# EAGLE board CAN_ProtoBoard (EAGLE 7.2.0)
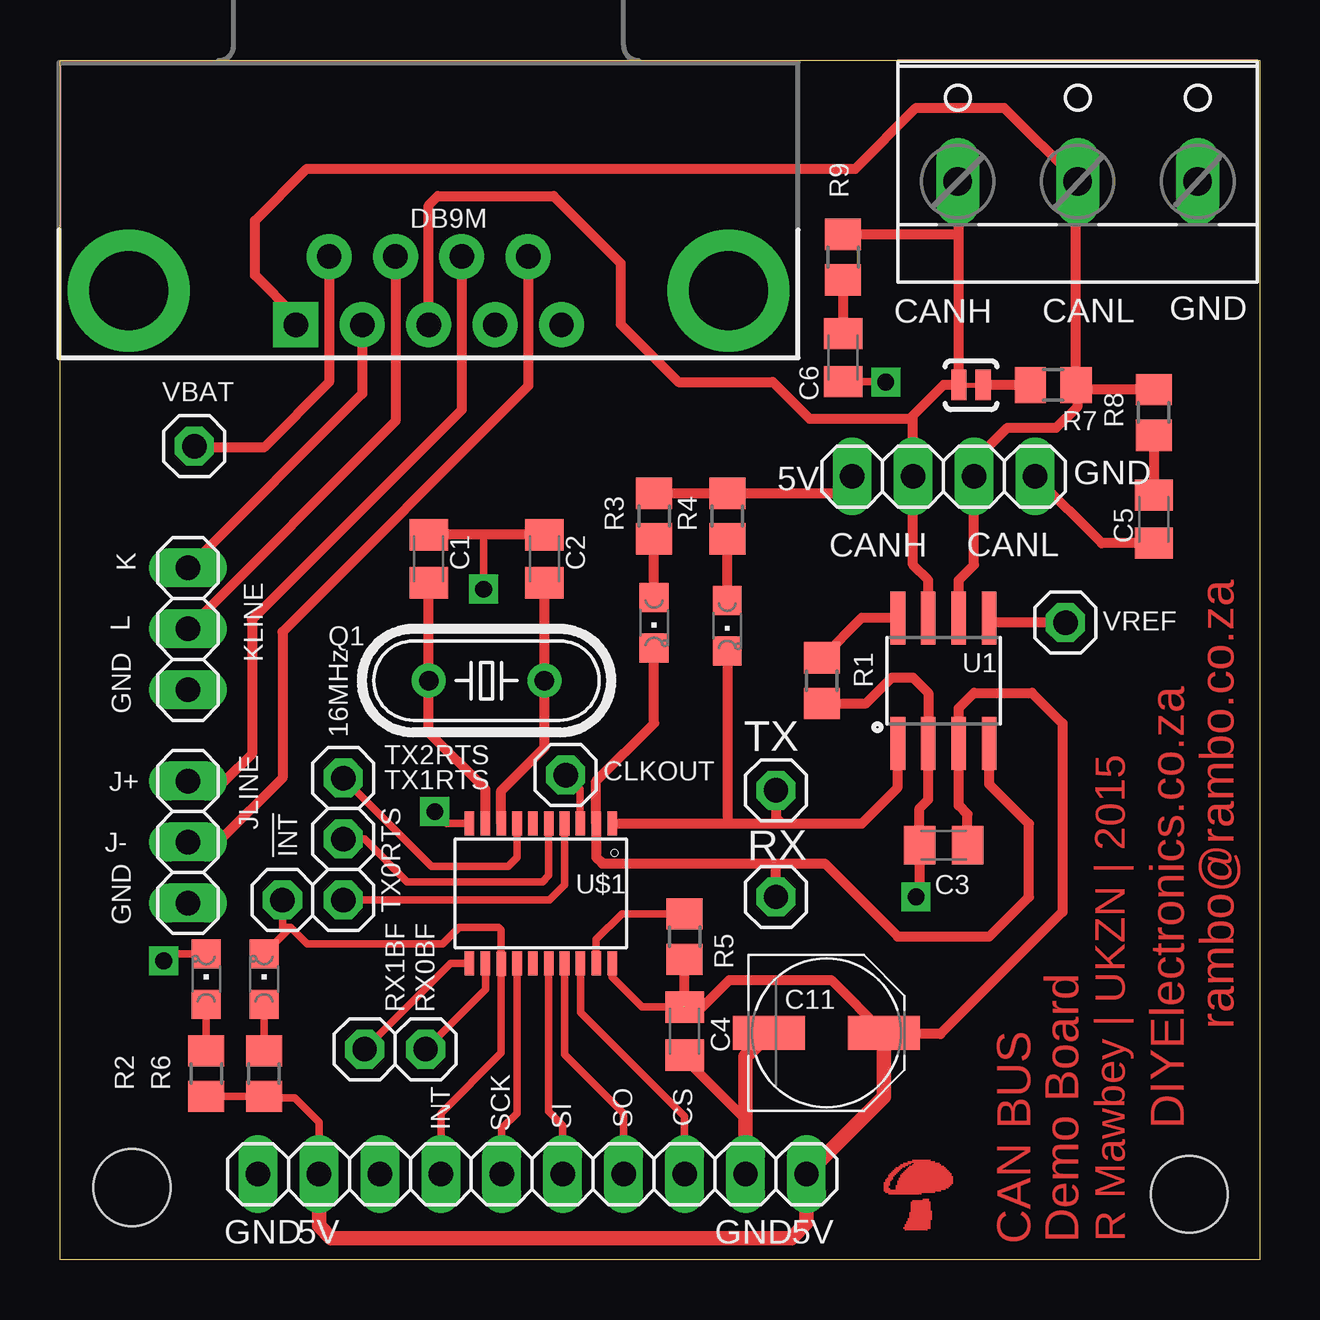
[diagram p0: board, top side]
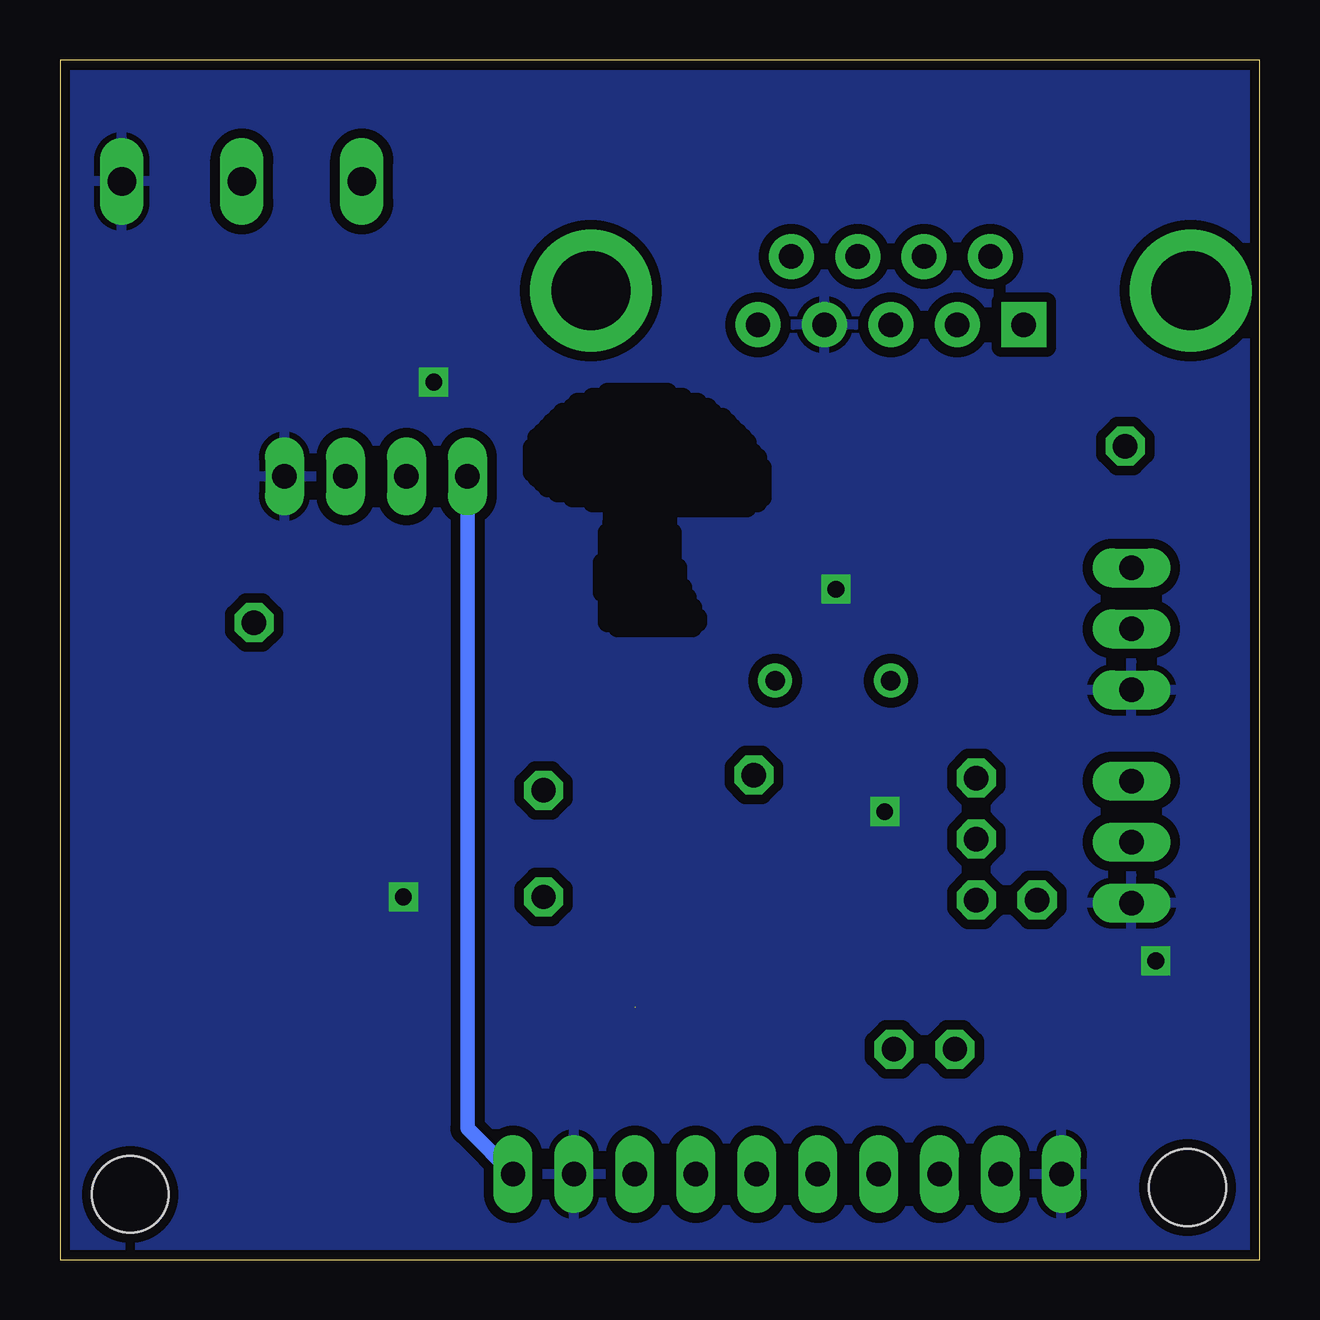
[diagram p1: board, bottom side, seen from below]

Size 50 x 50 mm. Coordinates in mm from the lower left corner, seen from the top.
Outline: 0,0 0,50 50,50 50,0 0,0
Copper layers (1*16): Top 0.035mm / dielectric 1.5mm / Bottom 0.035mm
Design rules "SparkFun": minimum track width 8mil, minimum drill 20mil, track to track 8mil, track to pad 8mil, pad to pad 8mil, via to via 8mil, smd to smd 8mil, copper to edge 10mil, drill to drill 8mil, minimum pad ring 12mil, minimum via ring 10mil, stop-mask expansion 4mil, vias tented up to drill 25mil, thermal gap 10mil
Holes 3.2 mm at 3,3 47.07,2.71
bRestrict: area 23.6,26.4 to 26.8,26.6; area 23.4,26.6 to 27.2,26.8; area 23.6,26.8 to 27.2,27; area 23.6,27 to 27.2,27.2; area 23.9,27.2 to 27.2,27.4; area 23.9,27.4 to 27.2,27.6; area 24.1,27.6 to 27.2,27.8; area 24.1,27.8 to 27.4,28; area 24.3,28 to 27.4,28.2; area 24.3,28.2 to 27.4,28.4; area 24.3,28.4 to 27.4,28.6; area 24.3,28.6 to 27.4,28.9; 50 more areas

## Footprints (pad centres in the part's own frame; a part is rotated, then mirrored left to right if it is on the bottom)
1X01 = drill 1.016 octagon: 1 0,0
C0805K = smd 1.3 x 1.6: 1 -1,0; 2 1,0
PANASONIC_D = smd 3 x 1.4: + 2.4,0; - -2.4,0
1X04 = drill 1.016 long: 1 -3.81,0; 2 -1.27,0; 3 1.27,0; 4 3.81,0
W237-103 = drill 1.194 long: 1 -5,-1.29; 2 0,-1.29; 3 5,-1.29
DB9_MALE = drill 1.016 pad 1.88: 1 5.54,-1.42; 2 2.77,-1.42; 3 0,-1.42; 4 -2.77,-1.42; 6 4.15,1.42; 7 1.38,1.42; 8 -1.38,1.42; 9 -4.15,1.42 | drill 1.016 pad 1.88 square: 5 -5.54,-1.42 | drill 3.302 pad 5.08: G1 -12.5,0; G2 12.5,0
1X10 = drill 1.016 long: 1 -11.43,0; 2 -8.89,0; 3 -6.35,0; 4 -3.81,0; 5 -1.27,0; 6 1.27,0; 7 3.81,0; 8 6.35,0; 9 8.89,0; 10 11.43,0
1X03 = drill 1.016 long: 1 -2.54,0; 2 0,0; 3 2.54,0
CHIPLED_0805 = smd 1.2 x 1.2: A 0,-1.05; C 0,1.05
HC49/S = drill 0.813: 1 -2.413,0; 2 2.413,0
R0805 = smd 1.3 x 1.5: 1 -0.95,0; 2 0.95,0
SJ_2S-TRACE = smd 0.635 x 1.27: 1 -0.508,0; 2 0.508,0
SO08 = smd 0.61 x 2.21: 1 -1.905,-2.616; 2 -0.635,-2.616; 3 0.635,-2.616; 4 1.905,-2.616; 5 1.905,2.616; 6 0.635,2.616; 7 -0.635,2.616; 8 -1.905,2.616
TSSOP20 = smd 1 x 0.4: 1 -2.937,2.693; 2 -2.937,2.032; 3 -2.937,1.372; 4 -2.937,0.712; 5 -2.937,0.051; 6 -2.937,-0.609; 7 -2.937,-1.27; 8 -2.943,-1.93; 9 -2.937,-2.59; 10 -2.937,-3.251; 11 2.905,-3.251; 12 2.905,-2.59; 13 2.911,-1.93; 14 2.905,-1.27; 15 2.905,-0.609; 16 2.905,0.051; 17 2.905,0.712; 18 2.905,1.372; 19 2.905,2.032; 20 2.905,2.693

## Placement (x,y rotation side)
!INT  [1X01]  9.27,14.99 0 top
C1  22pF  [C0805K]  15.37,29.21 270 top
C2  22pF  [C0805K]  20.19,29.21 270 top
C3  100nF  [C0805K]  36.83,17.27 180 top
C4  100nF  [C0805K]  26.04,9.53 270 top
C5  560pF  [C0805K]  45.59,30.86 90 top
C6  560pF  [C0805K]  32.64,37.59 90 top
C11  100uF  [PANASONIC_D]  31.95,9.45 0 top
CAN  [1X04]  36.83,32.64 180 top
CANSCREW  [W237-103]  42.42,46.23 0 top
CLKOUT  [1X01]  21.08,20.19 0 top
DB9M  [DB9_MALE]  15.37,40.39 0 top
IO  [1X10]  19.68,3.56 0 top
JLINE  [1X03]  5.33,17.4 90 top
KLINE  [1X03]  5.33,26.29 90 top
LED1  PWR  [CHIPLED_0805]  6.1,11.68 0 top
LED2  RX  [CHIPLED_0805]  24.77,26.54 180 top
LED3  TX  [CHIPLED_0805]  27.81,26.42 180 top
LED4  INT  [CHIPLED_0805]  8.51,11.68 0 top
Q1  16MHz  [HC49/S]  17.78,24.13 180 top
R1  [R0805]  31.75,24.13 270 top
R2  [R0805]  6.1,7.75 270 top
R3  1k  [R0805]  24.77,30.99 90 top
R4  1k  [R0805]  27.81,30.99 90 top
R5  10k  [R0805]  26.04,13.46 270 top
R6  1k  [R0805]  8.51,7.75 270 top
R7  120E  [R0805]  41.4,36.45 0 top
R8  100E  [R0805]  45.59,35.31 90 top
R9  100E  [R0805]  32.64,41.78 90 top
RX  [1X01]  29.84,15.11 0 top
RX0BF  [1X01]  15.24,8.76 0 top
RX1BF  [1X01]  12.7,8.76 0 top
SJ1  Term  [SJ_2S-TRACE]  37.97,36.45 0 top
TX  [1X01]  29.84,19.56 0 top
TX0RTS  [1X01]  11.81,14.99 0 top
TX1RTS  [1X01]  11.81,17.53 0 top
TX2RTS  [1X01]  11.81,20.07 0 top
U1  MCP2551  [SO08]  36.83,24.13 0 top
U$1  MCP2515SO  [TSSOP20]  20.32,15.24 270 top
VBAT  [1X01]  5.6,33.9 0 top
VREF  [1X01]  41.91,26.54 0 top

## Library data of the parts
!INT CAN CLKOUT IO JLINE KLINE RX RX0BF RX1BF TX TX0RTS TX1RTS TX2RTS VBAT VREF = pinhead
C1-C6 C11 R1-R9 = resistor
CANSCREW = con-wago-500; MPN: 237-103; OC_FARNELL: unknown; OC_NEWARK: 18M7116
DB9M = SparkFun-Connectors; PROD_ID: CONN-09904
LED1-LED4 = led
Q1 = crystal; OC_FARNELL: 1667008; OC_NEWARK: unknown
SJ1 = SparkFun-Retired
U1 = SparkFun-DigitalIC; PROD_ID: IC-09907
U$1 = RobThePyro

## Nets
+5V: C3.1 C4.1 C11.+ CAN.4 IO.2 IO.10 R2.2 R3.2 R4.2 R5.2 R6.2 U1.3 U$1.20
CANH: CAN.3 CANSCREW.1 DB9M.3 R9.2 SJ1.1 U1.7
CANL: CAN.2 CANSCREW.2 DB9M.5 R7.2 R8.2 U1.6
CLKOUT: CLKOUT.1 U$1.3
CS: IO.8 U$1.18
GND: C1.1 C2.1 C3.2 C4.2 C5.1 C6.1 C11.- CAN.1 CANSCREW.3 DB9M.2 IO.1 IO.9 JLINE.1 KLINE.1 LED1.C R1.2 U1.2 U$1.10
INT: !INT.1 IO.4 LED4.C U$1.13
J+: DB9M.7 JLINE.3
J-: DB9M.6 JLINE.2
K: DB9M.4 KLINE.3
L: DB9M.8 KLINE.2
N$1: C1.2 Q1.2 U$1.9
N$2: C2.2 Q1.1 U$1.8
N$3: LED2.A R3.1
N$4: LED3.A R4.1
N$5: R5.1 U$1.19
N$6: LED1.A R2.1
N$7: LED4.A R6.1
N$8: R1.1 U1.8
N$9: R7.1 SJ1.2
N$10: U1.5 VREF.1
N$11: C5.2 R8.1
N$12: C6.2 R9.1
N$16: IO.3
RX0BF: RX0BF.1 U$1.12
RX1BF: RX1BF.1 U$1.11
RXCAN: LED2.C RX.1 U1.4 U$1.2
SCK: IO.5 U$1.14
SI: IO.6 U$1.16
SO: IO.7 U$1.17
TX0RTS: TX0RTS.1 U$1.4
TX1RTS: TX1RTS.1 U$1.5
TX2RTS: TX2RTS.1 U$1.7
TXCAN: LED3.C TX.1 U1.1 U$1.1
VBAT: DB9M.9 VBAT.1

## Tracks (layer width: path | path; a pad name or v marks a point on that pad's centre or on a via)
+5V  (1 unrouted)
  Top 0.305: U$1.20 23.01,11.79 24.26,10.54 26.02,10.54 | IO.2 10.79,5.71 9.78,6.73 8.57,6.73 R6.2 R2.2
  Top 0.406: C3.1 37.83,18.56 37.47,18.92 U1.3 37.47,22.99 38.1,23.62 40.51,23.62 41.78,22.35 41.78,14.48 36.7,9.4 34.4,9.4 C11.+ 32.15,11.65 27.9,11.65 26.77,10.53 C4.1 R5.2 25.83,12.34 | R3.2 R4.2 32.32,31.94 CAN.4
  Top 0.61: IO.2 10.79,1.4 11.3,0.89 30.48,0.89 31.11,1.52 IO.10 34.35,6.79 C11.+
  Bottom 0.61: CAN.4 33.02,5.46 IO.10
CANH
  Top 0.406: U1.7 36.2,28.32 35.56,28.96 CAN.3 35.56,35.18 | 37.47,42.67 SJ1.1 36.83,36.45 35.56,35.18 | 37.47,42.67 37.47,44.89 CANSCREW.1 | R9.2 37.4,42.73 37.47,42.67 | 35.56,35.18 35.43,35.05 31.24,35.05 29.72,36.58 25.78,36.58 23.37,38.99 23.37,41.53 20.57,44.32 15.75,44.32 15.37,43.94 DB9M.3
CANL
  Top 0.406: U1.6 37.47,28.32 38.1,28.96 CAN.2 38.1,33.27 39.5,34.67 41.53,34.67 42.42,35.56 42.42,36.38 R7.2 | DB9M.5 9.83,39.32 8.13,41.02 8.13,43.31 10.29,45.47 33.15,45.47 35.69,48.01 39.35,48.01 CANSCREW.2 42.35,44.87 R7.2 | R8.2 42.55,36.26 R7.2
CLKOUT
  Top 0.305: U$1.3 21.67,18.2 21.67,19.61 CLKOUT.1
CS
  Top 0.305: U$1.18 21.69,10.31 26.04,5.97 IO.8
GND  (via drill 0.7)
  Top 0.305: v17.65,27.94 17.65,30.21 | LED1.C 4.61,12.73 v4.32,12.45 | U$1.10 16.11,18.18 v15.62,18.67 | C6.1 34.4,36.59 v34.42,36.58
  Top 0.406: R1.2 33.59,23.18 34.67,24.26 35.56,24.26 36.2,23.62 U1.2 36.2,19.18 35.83,18.81 C3.2 35.83,15.26 v35.69,15.11 | C2.1 17.65,30.21 C1.1 | C4.2 26.04,8.38 28.57,5.84 IO.9 | C5.1 43.42,29.86 CAN.1
  Top 0.61: C11.- 28.57,8.47 IO.9
  pour Bottom (isolate 0.406): 0,0 0,50.02 49.78,50.02 49.78,0
INT
  Top 0.305: IO.4 15.88,6.1 18.39,8.61 U$1.13 18.39,13.74 18.29,13.84 16.64,13.84 15.95,13.15 10.31,13.15 9.62,13.84 | 9.62,13.84 LED4.C | !INT.1 9.27,13.84 9.62,13.84
J+
  Top 0.406: DB9M.7 16.75,35.42 8,26.67 8,21.08 6.86,19.94 JLINE.3
J-
  Top 0.406: DB9M.6 19.52,36.41 9.27,26.16 9.27,20.07 6.6,17.4 JLINE.2
K
  Top 0.406: DB9M.4 12.6,36.09 KLINE.3
L
  Top 0.406: DB9M.8 13.99,34.94 KLINE.2
N$1
  Top 0.406: C1.2 Q1.2 15.37,21.97 17.73,19.61 U$1.9
N$2
  Top 0.406: C2.2 Q1.1 20.19,21.34 18.39,19.53 U$1.8
N$3
  Top 0.406: LED2.A R3.1
N$4
  Top 0.406: LED3.A R4.1
N$5
  Top 0.305: R5.1 23.43,14.41 22.35,13.34 U$1.19 | U$1.19
N$6
  Top 0.305: R2.1 LED1.A
N$7
  Top 0.305: R6.1 LED4.A
N$8
  Top 0.406: U1.8 33.42,26.75 R1.1
N$9
  Top 0.406: R7.1 SJ1.2
N$10
  Top 0.406: VREF.1 38.94,26.54 U1.5
N$11
  Top 0.406: R8.1 C5.2
N$12
  Top 0.406: R9.1 C6.2
RX0BF
  Top 0.305: U$1.12 17.73,11.25 RX0BF.1
RX1BF
  Top 0.305: U$1.11 16.27,12.34 RX1BF.1
RXCAN
  Top 0.406: 29.84,16.51 22.61,16.51 22.35,16.76 U$1.2 22.35,19.94 24.77,22.35 LED2.C | 29.84,16.51 31.88,16.51 34.92,13.46 38.73,13.46 40.39,15.11 40.39,18.16 38.73,19.81 U1.4 | RX.1 29.84,16.51
SCK
  Top 0.305: U$1.14 19.05,6.1 18.41,5.46 IO.5
SI
  Top 0.305: U$1.16 20.37,6.17 20.95,5.59 IO.6
SO
  Top 0.305: U$1.17 21.03,8.56 23.5,6.1 IO.7
TX0RTS
  Top 0.305: U$1.4 21.03,18.13 21.03,15.62 20.4,14.99 TX0RTS.1
TX1RTS
  Top 0.305: U$1.5 20.37,18.13 20.37,16 20.12,15.75 14.48,15.75 12.7,17.53 TX1RTS.1
TX2RTS
  Top 0.305: U$1.7 19.05,16.76 18.67,16.38 15.49,16.38 TX2RTS.1
TXCAN
  Top 0.406: U$1.1 27.81,18.18 | 27.81,18.18 30.1,18.18 | 30.1,18.18 33.42,18.18 34.92,19.68 U1.1 | TX.1 29.84,18.43 30.1,18.18 | LED3.C 27.81,18.18
VBAT
  Top 0.406: DB9M.9 11.22,36.57 8.5,33.85 5.65,33.85 VBAT.1
(copper drawn outside any net)
  shapes: Top area x62

## Text on the board
Top: rambo@rambo.co.za | DIYElectronics.co.za | CAN BUS | Demo Board | R Mawbey | UKZN | 2015
tNames: CANH | CANL | GND | 5V | GND | CANH | K | CANL | L | GND | J+ | J- | GND | SO | CS | INT | SCK | SI | GND | 5V | GND | 5V